# Altium PCB PCB_DH_7LED.PcbDoc
Units mil, origin at the board's own origin, x right, y up, seen from the top; angles counter-clockwise.
Board outline 9080 x 3075 mil, 2 copper layers (Top Layer, Bottom Layer); 75 components, 69 nets, 272 pads, 86 vias.
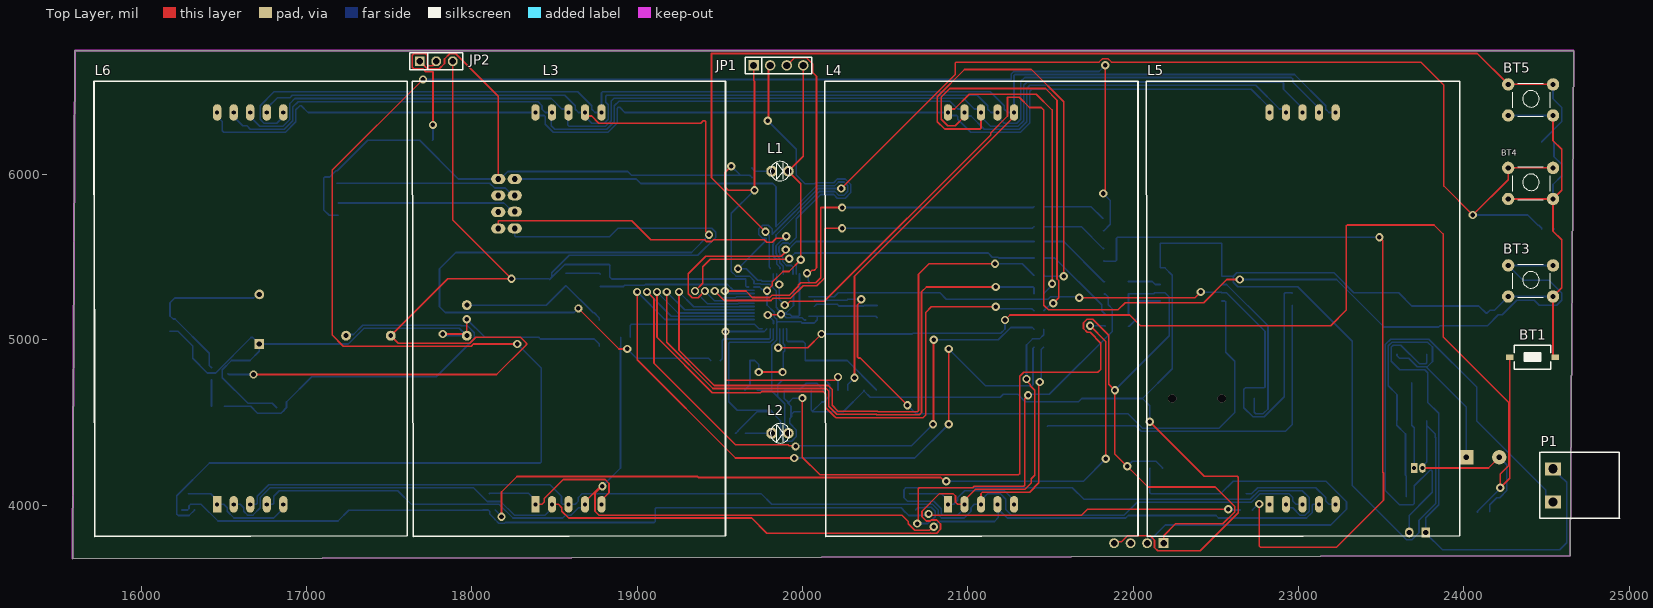
[diagram p0: Top Layer view]
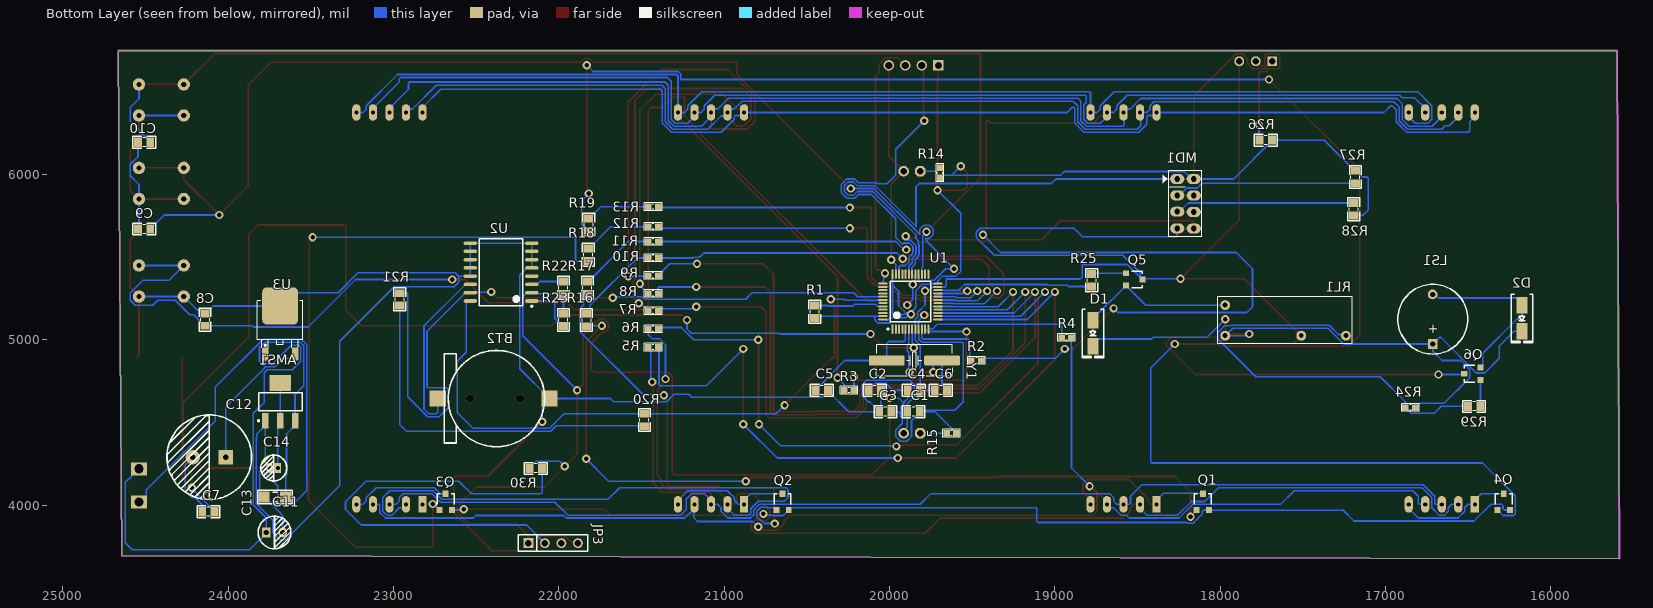
[diagram p1: Bottom Layer view, seen from below]

## Layer stack, top to bottom
Top Solder: solder mask 0.4, Solder Resist, Dk 3.5
Top Layer: signal copper 1.4
Dielectric 1: dielectric 12.6, FR-4, Dk 4.8
Bottom Layer: signal copper 1.4
Bottom Solder: solder mask 0.4, Solder Resist, Dk 3.5

## Board outline
15585,3675 15600,6750 24665,6750 24645,3695

## Design rules (kind name [scope] priority, off if disabled: settings)
Clearance [All] p1: gap=10 ignorepadtopadclearanceinfootprint=FALSE except(0: Arc-Hole Track-Hole SMDPad-Hole THPad-Hole Via-Hole Fill-Hole Poly-Hole Region-Hole Text-Hole; 8: Arc-Arc Arc-Track Track-Track)
PolygonConnect [All] p1: connectstyle=Relief reliefconductorwidth=10 reliefentries=4 polygonreliefangle="90 Angle" airgapwidth=10
RoutingVias [All] p1: holewidth=28 width=50 viastyle="Through Hole" minholewidth=28 minwidth=50 maxholewidth=28 maxwidth=50
SolderMaskExpansion [All] p1: expansion=4 istentingtop=FALSE
Width [All] p1: maxlimit=10 minlimit=10 preferedwidth=10
30 further rules are at their usual default settings.

## Classes and differential pairs
component class SCH_SPEAKER: D2 LS1 Q6 R29
component class SCH_RELAY: D1 Q5 R24 R25 RL1
component class SCH_POWER: AMS1 C11 C12 C13 C14 P1 U3
component class SCH_LED_7_SEG: L1 L2 L3 L4 L5 L6 Q1 Q2 Q3 Q4 R14 R15 R16 R17 R18 R19
component class SCH_IR: JP2 R26
component class SCH_ESP8266: MD1 R27 R28
component class SCH_DS3231: BT2 R20 R21 R22 R23 U2
component class SCH_DHT11: JP3 R30
component class SCH_DH_7LED: BT1 C1 C2 C3 C4 C5 C6 C7 JP1 R1 R2 R3 R4 R5 R6 R7 R8 R9 R10 R11 R12 R13 U1 Y1
component class SCH_BUTTON: BT3 BT4 BT5 C8 C9 C10

## Components (designator, comment, footprint, x,y, rotation, side; value= is the part's Value field where it differs from the comment)
AMS1 "" SOT223 23684.7,4625 r180 bottom value="AMS1117-3.3V SOT223"
BT1 "Nut Nhan 2 Chan SMD 3x6x2.5" "Nut Nhan 2 Chan SMD 3x6x2.5" 24416.08,4895 r180 top
BT2 "CR1220 SMD" "DE PIN CR1220" 22395,4645 r270 bottom
BT3 "" "Nut Nhan 4 Chan Cam 6x6" 24282,5458 r0 top
BT4 "" "Nut Nhan 4 Chan Cam 6x6" 24282,6048 r0 top
BT5 "" "Nut Nhan 4 Chan Cam 6x6" 24282,6553 r0 top
C1 "104" "tu 0805" 19855,4565 r0 bottom
C2 "104" "tu 0805" 20090,4695 r180 bottom
C3 "104" "tu 0805" 20025,4565 r0 bottom
C4 "104" "tu 0805" 19852.77,4695.13 r180 bottom
C5 "22pF" "tu 0805" 20410,4695 r180 bottom
C6 "22pF" "tu 0805" 19690,4695 r180 bottom
C7 "104" "tu 0805" 24120,3960 r0 bottom
C8 "104" "tu 0805" 24140.13,5122.43 r90 bottom
C9 "104" "tu 0805" 24508.56,5670 r0 bottom
C10 "104" "tu 0805" 24508.56,6195 r0 bottom
C11 "0.33uF" "tu hoa 5mm" 23720,3835 r180 bottom
C12 "10uF" "tu hoa 13mm" 24115,4290 r0 bottom
C13 "104" "tu 1206" 23717.49,4050 r0 bottom
C14 "22uF" "tu hoa 4mm" 23725,4225 r0 bottom
D1 "M7" "DIODE SMA" 18770,5040 r270 bottom
D2 "M7" "DIODE SMA" 16175,5130 r270 bottom
JP1 "JP" "JP 1x4 DT" 19705,6660 r0 top
JP2 "IR" "JP 1x3 CT" 17685,6685 r0 top
JP3 "DHT11" "JP 1x4 CT" 22185,3770 r180 bottom
L1 "" LED-3MM-RED 19815,6020 r0 top
L2 "" LED-3MM-RED 19815,4435 r0 top
L3 "" LED7SEG_2.3inch 18545,5040 r0 top
L4 "" LED7SEG_2.3inch 21040,5040 r0 top
L5 "" LED7SEG_2.3inch 22985,5040 r0 top
L6 "" LED7SEG_2.3inch 16620,5040 r0 top
LS1 "SPEAKER" "Coi Chip Speacker" 16714.5,4975 r90 bottom
MD1 "ESP8266 Module" "ESP2866 Module" 18260,5973 r270 bottom
P1 "" "CON 2 2EDG5.08" 24540,4220 r270 top
Q1 "" SOT23 18105,4020 r180 bottom value=C9014
Q2 "" SOT23 20647.4,4020 r180 bottom value=C9014
Q3 "" SOT23 22685,4020 r180 bottom value=C9014
Q4 "" SOT23 16285,4020 r180 bottom value=C9014
Q5 "HF" SOT23 18520,5365 r270 bottom value=C9014
Q6 "HF" SOT23 16475,4795 r90 bottom value=C9014
R1 "10k" "tro smd 0805" 20455,5170 r90 bottom
R2 "" "tro smd 0603" 19475,4875 r180 bottom
R3 "" "tro smd 0603" 20245,4695 r0 bottom
R4 "" "tro smd 0603" 18930,5015 r180 bottom
R5 "" "tro smd 0603" 21430,4955 r180 bottom
R6 "" "tro smd 0603" 21430,5065 r180 bottom
R7 "" "tro smd 0603" 21430,5175 r180 bottom
R8 "" "tro smd 0603" 21430,5280 r180 bottom
R9 "" "tro smd 0603" 21430,5390 r180 bottom
R10 "" "tro smd 0603" 21430,5495 r180 bottom
R11 "" "tro smd 0603" 21430,5595 r180 bottom
R12 "" "tro smd 0603" 21430,5685 r180 bottom
R13 "" "tro smd 0603" 21430,5805 r180 bottom
R14 "330R" "tro smd 0603" 19695,6010 r90 bottom
R15 "330R" "tro smd 0603" 19625,4435 r0 bottom
R16 "100R" "tro smd 0805" 21830,5120 r270 bottom
R17 "100R" "tro smd 0805" 21825,5315 r270 bottom
R18 "100R" "tro smd 0805" 21820,5515 r270 bottom
R19 "100R" "tro smd 0805" 21817.61,5697.57 r270 bottom
R20 "4.7k" "tro smd 0805" 21485,4515 r90 bottom
R21 "4.7k" "tro smd 0805" 22960,5245 r270 bottom
R22 "4.7k" "tro smd 0805" 21975,5315 r90 bottom
R23 "4.7k" "tro smd 0805" 21975,5120 r90 bottom
R24 "100R" "tro smd 0603" 16850,4590 r180 bottom
R25 "100R" "tro smd 0805" 18780,5360 r90 bottom
R26 "4.7k" "tro smd 0805" 17725,6210 r180 bottom
R27 "10k" "tro smd 0805" 17180,5985 r270 bottom
R28 "10k" "tro smd 0805" 17195,5790 r90 bottom
R29 "100R" "tro smd 0805" 16465,4600 r180 bottom
R30 "4.7k" "tro smd 0805" 22140,4220 r0 bottom
RL1 "" "Relay 4 chan HF46F" 17970,5025 r0 bottom
U1 "" STM32_LQPF48 19873.66,5231.42 r90 bottom
U2 "DS3231" "SOIC 16" 22350,5410 r0 bottom
U3 "" TO252 23686.14,5059.33 r180 bottom
Y1 "16Mhz" "Thach Anh 2 chan SMD" 19850,4875 r0 bottom value=4Mhz

## Footprints (in the part's own frame and the unit in brackets; to place one, negate y for a bottom-side part, rotate by r counter-clockwise, add the part's x,y. Pads: shape width x height; smd on the part's side, far side on the other; paste and mask are expansions set on the pad)
"Coi Chip Speacker" [mm]
  rect 1.5x1.5 hole 0.8: 1(0,0)
  round 1.5 hole 0.8: 2(7.62,0.013)
  silkscreen extent -1.55,-5.38 9.18,5.36, body extent -2.22,-6 13.24,6, height 4.5
"CON 2 2EDG5.08" [mm]
  rect 2x2.5 hole 1.4: 1(0,0) 2(5.08,0)
  silkscreen extent -2.54,-2.03 7.62,10.21, body extent -2.5,-1.75 7.58,10.25, height 3.15
"DE PIN CR1220" [mm]
  rect 2.5x2.5 smd: 1(0,-8.6) 2(0,8.6)
  silkscreen extent -7.39,-7.6 7.4,7.84, body extent -7.39,-9.42 7.36,9.38, height 4.27
"DIODE SMA" [mm] "SMA"
  rect 2.5x1.7 smd: 1(-2,0) 2(2,0)
  silkscreen extent -3.68,-1.65 3.75,1.65, body extent -2.6,-1.37 2.6,1.37, height 2.4
"ESP2866 Module" [mil]
  oval 60x86 hole 36: 1(0,0) 2(99,0) 3(198,0) 4(299,0) 5(0,100) 6(100,100) 7(199.5,100) 8(300,100)
  silkscreen extent -51,-86 350,149, body extent -137,-817 433,159, height 381
"JP 1x3 CT" [mm]
  rect 1.52x1.52 hole 1.02: 1(0,0)
  round 1.52 hole 1.02: 2(2.54,0) 3(5.08,0)
  silkscreen extent -1.52,-1.27 6.6,1.27, body extent -1.52,-1.25 6.6,1.25, height 8.51
"JP 1x4 CT" [mm]
  rect 1.52x1.52 hole 1.02: 1(0,0)
  round 1.52 hole 1.02: 2(2.54,0) 3(5.08,0) 4(7.62,0)
  silkscreen extent -1.52,-1.27 9.14,1.27, body extent -1.52,-1.25 9.14,1.25, height 8.51
"JP 1x4 DT" [mm] "4 pins, 1 row, straight, gold plating"
  rect 1.6x1.6 hole 1.1: 1(0,0)
  round 1.6 hole 1.1: 2(2.54,0) 3(5.08,0) 4(7.62,0)
  silkscreen extent -1.27,-1.27 8.89,1.27, body extent -1.27,-1.27 8.89,1.27, height 8.54
LED7SEG_2.3inch [mil] "Dán"
  rect 50x100 hole 25: 1(-160,-1035)
  oval 50x100 hole 25: 2(-60,-1035) 3(40,-1035) 4(140,-1035) 5(240,-1035) 6(240,1335.08) 7(140,1335.08) 8(40,1335.08) 9(-60,1335.08) 10(-160,1335.08)
  silkscreen extent -905,-1230 990,1525, body extent -905,-1228 985,1528, height 480
LED-3MM-RED [mil]
  oct 65x65 hole 40: 1(0,0)
  round 65 hole 40: 2(100,0)
  silkscreen extent -9,-59 109,59, body extent -27,-77 117,80, height 181
"Nut Nhan 2 Chan SMD 3x6x2.5" [mm] "Switch SMD type"
  rect 1.2x0.8 smd: 1(-3.5,0) 2(3.5,0)
  silkscreen extent -2.82,-1.85 2.82,1.85, body extent -3.05,-1.85 3.05,1.85, height 2.5
"Nut Nhan 4 Chan Cam 6x6" [mil] "SW button 4pin, 250 x250 mil"
  round 75 hole 31: 1(-13,-8) 1(258,-8) 2(-13,-196) 2(258,-196)
  silkscreen extent 15,-215 240,0, body extent -31,-225 281,19, height 276
"Relay 4 chan HF46F" [mil]
  round 60 hole 30: 1(0,0) 2(0,-185.04) 3(-460,0) 4(-730,0)
  silkscreen extent -770,-235 46,50, body extent -763,-228 40,48, height 154
"SOIC 16" [mm] "SOIC, 16-Leads, Body 10.30x7.50mm, Pitch 1.27mm, IPC Medium Density"
  oval 2.032x0.55 smd: 1(-4.725,4.445) 2(-4.725,3.175) 3(-4.725,1.905) 4(-4.725,0.635) 5(-4.725,-0.635) 6(-4.725,-1.905) 7(-4.725,-3.175) 8(-4.725,-4.445) 9(4.725,-4.445) 10(4.725,-3.175) 11(4.725,-1.905) 12(4.725,-0.635) 13(4.725,0.635) 14(4.725,1.905) 15(4.725,3.175) 16(4.725,4.445)
  silkscreen extent -4.85,-5.15 3.35,5.39, body extent -5.15,-5.17 5.16,5.16, height 2.48
SOT23 [mm] "SOT23"
  rect 0.9x0.95 smd: 1(-0.95,-1.25) 2(0,1.25)
  rect 0.9x0.95 smd mask+0: 3(0.95,-1.25)
  silkscreen extent -1.3,-0.38 1.3,1.25, body extent -1.52,-1.23 1.48,1.27, height 1.06
SOT223 [mm]
  rect 1x2.4 smd: 1(-2.3,-2.9) 2(0,-2.9) 3(2.3,-2.9)
  rect 3.3x2.4 smd: 4(0,2.9)
  silkscreen extent -3.48,-3.02 3.35,1.4, body extent -3.25,-3.56 3.25,3.4, height 1.68
STM32_LQPF48 [mm]
  oval 1.45x0.3 smd: 1(-4.225,2.75) 2(-4.225,2.25) 3(-4.225,1.75) 4(-4.225,1.25) 5(-4.225,0.75) 6(-4.225,0.25) 7(-4.225,-0.25) 8(-4.225,-0.75) 9(-4.225,-1.25) 10(-4.225,-1.75) 11(-4.225,-2.25) 12(-4.225,-2.75) 25(4.225,-2.75) 26(4.225,-2.25) 27(4.225,-1.75) 28(4.225,-1.25) 29(4.225,-0.75) 30(4.225,-0.25) 31(4.225,0.25) 32(4.225,0.75) 33(4.225,1.25) 34(4.225,1.75) 35(4.225,2.25) 36(4.225,2.75)
  oval 0.3x1.45 smd: 13(-2.75,-4.225) 14(-2.25,-4.225) 15(-1.75,-4.225) 16(-1.25,-4.225) 17(-0.75,-4.225) 18(-0.25,-4.225) 19(0.25,-4.225) 20(0.75,-4.225) 21(1.25,-4.225) 22(1.75,-4.225) 23(2.25,-4.225) 24(2.75,-4.225) 37(2.75,4.225) 38(2.25,4.225) 39(1.75,4.225) 40(1.25,4.225) 41(0.75,4.225) 42(0.25,4.225) 43(-0.25,4.225) 44(-0.75,4.225) 45(-1.25,4.225) 46(-1.75,4.225) 47(-2.25,4.225) 48(-2.75,4.225)
  silkscreen extent -4.35,-3.1 3.1,3.58, body extent -4.5,-4.5 4.5,4.5, height 1.6
"Thach Anh 2 chan SMD" [mm] "SMD Crystal HC49/US-SM package"
  round 0.508 on Mech15: 0(0,0)
  rrect25% 5.5x1.5 smd: 1(-4.25,0) 2(4.25,0)
  silkscreen extent -5.84,-2.41 5.84,2.41, body extent -6.4,-2.41 6.4,2.42, height 4.29
TO252 [mm] "TO252"
  round 0.5 on Mech15: 0(0,0)
  rrect25% 1x2 smd: 1(-2.285,-3.7) 3(2.285,-3.7)
  rrect25% 5.5x5.7 smd: 2(0,3.7)
  silkscreen extent -3.5,-2.7 3.5,4.5, body extent -3.3,-3.95 3.3,5.76, height 2.31
"tro smd 0603" [mm] "Chip Capacitor, 2-Leads, Body 1,60x0,80mm, IPC Medium Density"
  rect 1x0.95 smd mask+0.076: 1(-0.75,0) 2(0.75,0)
  silkscreen extent -1.35,-0.58 1.37,0.58, body extent -0.82,-0.42 0.82,0.43, height 0.44
"tro smd 0805" [mm]
  rect 1.2x1.4 smd: 1(-0.946,-0.061) 2(0.954,-0.061)
  silkscreen extent -1.75,-0.97 1.75,0.84, body extent -1.56,-0.76 1.44,0.64, height 0.53
"tu 0805" [mm] "Compoment SMD 80x50mil"
  rect 1.2x1.4 smd: 1(-0.946,-0.003) 2(0.954,-0.003)
  silkscreen extent -1.75,-0.89 1.75,0.89, body extent -1.01,-0.64 1.01,0.63, height 0.61
"tu 1206" [mm]
  rect 1.7x1.7 smd: 1(-1.65,0) 2(1.65,0)
  silkscreen extent -2.67,-1.02 2.67,1.02, body extent -1.57,-0.8 1.63,0.8, height 0.94
"tu hoa 4mm" [mm]
  rect 1x1.5 hole 0.6: 1(-0.635,0)
  oval 1x1.5 hole 0.6: 2(0.635,0)
  silkscreen extent -2,-2 2.01,2.01, body extent -2.47,-2.47 2.58,2.58, height 14.81
"tu hoa 5mm" [mm]
  rect 1.3x1.5 hole 0.8: 1(-1.27,0)
  oval 1.3x1.5 hole 0.8: 2(1.27,0)
  silkscreen extent -2.51,-2.51 2.51,2.51, body extent -3.12,-3.18 3.23,3.18, height 14.55
"tu hoa 13mm" [mm]
  rect 2.2x2.2 hole 0.9: 1(-2.54,0)
  round 2.2 hole 0.9: 2(2.54,0)
  silkscreen extent -6.5,-6.5 6.5,6.5, body extent -6.25,-6.25 6.26,6.25, height 23.02

## Part data
AMS1: library part "AMS1117 SMD", "Dán", Chung_Loai=Dán, Don_Vi=Con, Ma_Hang=MH000596
BT2: library part "De pin CR1220 SMD", Ma_Hang=MH000833, Ten="Đế PIN CR1220 SMD"
BT3 BT4 BT5: library part "Nut Nhan 4 Chan Cam 6x6", "Nut Nhan 4 Chan 6x6mm", Ma_Hang=MH004584, Ten="Nút Nhấn 4 Chân 6x6x5MM DIP"
C1 C2 C3 C4 C7 C8 C9 C10: library part "Tu 0805 104 50V 10%", "Dán", Chung_Loai=Dán, Don_Vi=Con, Ma_Hang=MH004551, So_Chan=2, Ten_Linh_Kien="Tụ 0805 104-100nF 10% 50V"
C5 C6: library part "Tu 0805 22pF 50V 10%", "Dán", Chung_Loai=Dán, Don_Vi=Con, Ma_Hang=MH004560, So_Chan=2, Ten_Linh_Kien="Tụ 0805 22P 10% 50V"
C11: library part "Tu Hoa 0.33uF 50V 5x11", "Cắm", Chung_Loai=Cắm, Don_Vi=Con, Ma_Hang=MH004655, So_Chan=2, Ten_Linh_Kien="Tụ Hóa 0.33uF 50V 5x11MM"
C12: library part "Tu Hoa 10uF 450V 13x20", "Cắm", Chung_Loai=Cắm, Don_Vi=Con, Ma_Hang=MH003950, So_Chan=2, Ten_Linh_Kien="Tụ Hóa 10uF 450V 13x20MM"
C13: library part "Tu 1206 104 50V 20%", "Dán", Chung_Loai=Dán, Don_Vi=Con, Ma_Hang=MH004544, So_Chan=2, Ten_Linh_Kien="Tụ 1206 104-0.1uF 20% 50V"
C14: library part "Tu Hoa 22uF 16V 4x7", "Cắm", Chung_Loai=Cắm, Don_Vi=Con, Ma_Hang=MH006857, So_Chan=2, Ten_Linh_Kien="Tụ Hóa 22uF 16V"
D1 D2: library part "Diode M7 ( 4007 )", "Dán", Chung_Loai=Dán, Don_Vi=Con, Ma_Hang=MH000944, Ten_Linh_Kien="Diode M7 1N4007 SMD 1A 1000V"
JP1: library part "JP 1x4 2.54 Duc Thang", "Cắm", Chung_Loai=Cắm, Don_Vi=Con, Ma_Hang=MH000903, Ten_Linh_Kien="Jump Đơn Đực 2.54MM 1x40P Thẳng 11MM"
JP2: library part "JP 1x3 2.54 Cai Thang", "Cắm", Chung_Loai=Cắm, Don_Vi=Con, Ma_Hang=MH004006, Ten_Linh_Kien="Jump Đơn Cái 2.54MM 1x20P Thẳng"
JP3: library part "JP 1x4 2.54 Cai Thang", "Cắm", Chung_Loai=Cắm, Don_Vi=Con, Ma_Hang=MH004006, Ten_Linh_Kien="Jump Đơn Cái 2.54MM 1x20P Thẳng"
L1 L2: library part "LED 3mm Do", "Cắm", Chung_Loai=Cắm, Don_Vi=Con, Ma_Hang=MH003892, Ten_Linh_Kien="Led 3MM Phủ Đỏ (10c)"
L3 L4 L5 L6: library part "LED 7x1 2.3inch Anot", "Dán", Chung_Loai=Dán, Don_Vi=Con, Ma_Hang=MH000901, Ten_Linh_Kien="Led 7 2.3 1 Số Anot (Sáng Đỏ)"
LS1: library part "Coi Chip Speaker", "Còi chip"
P1: library part "CON 2 EDG5.08", "Cắm", Chung_Loai=Cắm, Don_Vi=Con, Ma_Hang=MH000759, Ten_Linh_Kien="CON 2 2EDG5.08-2P 5.08MM ( Xanh Cong)"
Q1 Q2 Q3 Q4 Q5 Q6: library part "C1815 HF SMD", "NPN transistor"
R1 R27 R28: library part "Tro 0805 5% 10k", "Dán", Chung_Loai=Dán, Don_Vi=Con, Ma_Hang=MH005239, So_Chan=2, Ten_Linh_Kien="Trở 0805 5% 10k"
R2 R3 R4 R5 R6 R7 R8 R9 R10 R11 R12 R13 R24: library part "Tro 0603 5% 100R", "Dán", Chung_Loai=Dán, Don_Vi=Con, Ma_Hang=MH006315, So_Chan=2, Ten_Linh_Kien="Trở 0603 5% 100R"
R14 R15: library part "Tro 0603 5% 330R", "Dán", Chung_Loai=Dán, Don_Vi=Con, Ma_Hang=MH006910, So_Chan=2, Ten_Linh_Kien="Trở 0603 5% 330R"
R16 R17 R18 R19 R25 R29: library part "Tro 0805 5% 100R", "Dán", Chung_Loai=Dán, Don_Vi=Con, Ma_Hang=MH005251, So_Chan=2, Ten_Linh_Kien="Trở 0805 5% 100R"
R20 R21 R22 R23 R26 R30: library part "Tro 0805 5% 4.7k", "Dán", Chung_Loai=Dán, Don_Vi=Con, Ma_Hang=MH005307, So_Chan=2, Ten_Linh_Kien="Trở 0805 5% 4.7k"
RL1: library part "Relay 4 chan HF46F", "Relay 4 chan HF46F", Ma_Hang=MH003879, Ten="Relay 5V5A HF46F-G 5-HS1"
U1: library part STM32F103xx_LQFP48, ComponentLink1Description="Manufacturer Link", ComponentLink1URL=www.st.com/stm32, ComponentLink2Description=Datasheet, ComponentLink2URL=http://www.st.com/stonline/products/literature/ds/13587.pdf, DatasheetVersion="rev6, Mar-2008", PackageDescription="48-Pin Low-Profile Quad Flat Pack, 7 x 7 mm Body, 0.5 mm Pitch (LQFP48)", PackageReference=LQFP48, PackageVersion=Mar-2008, Published=30-May-2008, Publisher="Altium Limited"
U2: library part "DS3231 SMD", "SOIC"
U3: library part "78M05 SMD TO252", "Dán", Chung_Loai=Dán, Don_Vi=Con, Ma_Hang=MH001917, Ten_Linh_Kien="78M05 TO252"
Y1: library part "Thach Anh 2 chan SMD", "Crystal For all Crystal 2pin."
BT1: Ma_Hang=MH001036, Ten="Nút Nhấn 2 Chân 3x6x2.5MM SMD"

## Via types
v1: diameter 50, hole 28, Top Layer to Bottom Layer, 84 vias
v2: diameter 50, hole 50, Top Layer to Bottom Layer, 2 vias

## Nets (pads, with @x,y where several pads share a name; then routed paths per layer and width w, separated by ;. In a path a pad name is that pad's centre, name@x,y a point inside that pad or via, vN(x,y) a via of type N, cw(c..) or ccw(c..) an arc to the next point about the centre after c; other vN are vias at no path point)
3.3V: C1.1 C2.1 C3.1 C4.1 JP1.1 JP2.1 JP3.1 MD1.5 R14.1 R15.1 R22.1 R23.2 R26.2 R27.1 R28.1 R30.2 U1.9 U1.24 U1.36 U1.48 U2.2 | length 16514.3
  Top Layer w10: JP2.1 17729.92,6640.08 17803.61,6640.08 17835,6671.47 17835,6698.53 17866.39,6729.92 17903.61,6729.92 18160,6473.53 MD1.5 ; v1(19570,6050) 19530,6010 19530,5925.46 19550.46,5905 v1(19710,5905) 19710,6565 19705,6570 JP1.1 ; v1(19790,5150) 19792.5,5152.5 19867.5,5152.5 v1(19870,5155) ; v1(19999.82,4647.69) 19999.82,4290.18 20105,4185 21309.14,4185 21315,4190.86 21315,4779.57 21338.43,4803 21787.14,4803 21805,4820.86 21805,4980 21740,5045 21723.43,5045 21700,5068.43 21700,5104.14 21720.86,5125 21756.57,5125 21853,5028.57 21853,4732 v1(21890,4695) 21890,4310 22090.54,4109.46 22497.11,4109.46 22615,3991.57 22615,3958.43 22543.24,3886.68 22256.76,3886.68 22185,3814.92 JP3.1
  Bottom Layer w10: R28.1 17137.23,5752.77 17105,5785 17105,5979.14 17110.86,5985 17141.23,5985 17178.46,6022.23 R27.1 17186.33,6022.23 17371.71,6207.61 R26.2 17687.43,6203.67 17918.09,5973 MD1.5 18173,5973 18218,6018 18943.41,6018 18966.25,5995.16 19624.84,5995.16 ; v1(19570,6050) 19624.84,5995.16 ; R15.1 19596.46,4435 19610.16,4448.7 19610.16,4450.23 19725.06,4565.13 C1.1 ; R14.1 19695,5981.46 19681.3,5995.16 19624.84,5995.16 ; v1(19710,5905) 19570,5765 19570,5413.43 19597.81,5385.62 19679.51,5385.62 19707.32,5357.81 U1.24 19745.81,5339.69 19749.28,5336.21 19802.34,5336.21 19819.4,5319.16 19819.4,5317.88 19841.4,5295.88 19841.4,5196.85 19848,5190.25 19848,5187.82 19865.12,5170.71 19875.71,5170.71 19883.77,5162.65 19900.8,5162.65 19946.21,5208.06 19946.21,5294.45 19980.85,5329.09 ; v1(19790,5150) 19825,5115 19825,5098.15 19823.61,5096.76 ; U1.9 19823.23,5063.86 19823.23,5003.87 19804.36,4985 19560.86,4985 19555,4979.14 19555,4625 19605,4575 19807.91,4575 C1.1 ; v1(19870,5155) v1@19880.82,5155 ; 19910.57,4621.3 19916.3,4621.3 19942.69,4647.69 v1(19999.82,4647.69) ; U1.36 19981.93,5148.7 19976.07,5142.84 19934.53,5142.84 19922.37,5155 v1@19880.82,5155 ; C3.1 19949.15,4565.13 19935.78,4551.76 19935.78,4535.94 19931.2,4531.36 ; U1.48@20020,5120.24 20010.07,5120.24 19997.11,5133.2 19902.62,5133.2 v1@19880.82,5155 ; C2.1 20127.23,4698.8 20088.61,4737.43 20022.59,4737.43 19980.16,4695 C4.1 19890,4645.65 19910.57,4625.08 19910.57,4619.53 19931.2,4598.91 19931.2,4531.36 ; v1(21890,4695) 22218.98,5023.98 22218.98,5259.17 22193.15,5285 22131.65,5285 22124.42,5277.77 R22.1 R23.2 ; v1(21965,4235) 21994.95,4264.95 22138.95,4264.95 22177.57,4226.33 R30.2 ; C1.1 19817.77,4561.2 19867.5,4511.47 19867.5,4415.32 19895.32,4387.5 19934.68,4387.5 19962.5,4415.32 19962.5,4454.68 19922.41,4494.77 19922.41,4522.57 19931.2,4531.36
5V: D1.2 D2.2 LS1.1 R24.2 RL1.1 | length 4134
  Top Layer w10: v1(17825,5035) 17970,5035 v1(17970,5125)
  Bottom Layer w10: D2.2 16223.46,5051.26 16312.17,4962.56 16312.17,4888.39 16400.87,4799.69 16450.7,4799.69 16664.69,5013.67 16675.83,5013.67 LS1.1 ; R24.2 16819.49,4590 16793.88,4615.61 16645.98,4615.61 16490.51,4771.07 16490.51,4818.93 16546.28,4874.7 16658.73,4874.7 16714.5,4930.47 LS1.1 ; v1(17825,5035) 17835,5025 RL1.1 17925,5070 17348.64,5070 17253.64,4975 LS1.1 ; v1(17970,5125) 18080,5015 18406,5015 18415.53,5005.47 18741.54,5005.47 18770,4977.01 D1.2
12V: Q1.3 Q2.3 Q3.3 Q4.3 | length 6665.6
  Top Layer w10: v1(20763.16,3947) 20770.16,3940 21688.98,3940 21723.98,3975 v1(22575,3975)
  Bottom Layer w10: Q4.3 16280.32,3970.79 16289.39,3979.87 16289.39,3995.41 16298.47,4004.49 16364.3,4004.49 16464.79,3904 17190.44,3904 17255.44,3969 18065.81,3969 Q1.3 18100.31,3970.79 18109.39,3961.71 18109.39,3946.16 18140,3915.56 18140,3913.43 18163.43,3890 18196.57,3890 18201.57,3895 19104.14,3895 19110,3900.86 19110,3979.14 19115.86,3985 20595.79,3985 20596.3,3984.49 20597.28,3984.49 20610,3971.77 Q2.3 20610,3969.8 20642.72,3937.09 20708.73,3937.09 20710.99,3939.35 20755.51,3939.35 v1(20763.16,3947) ; v1(22575,3975) 22579.21,3970.79 Q3.3
+3.3V: AMS1.2 AMS1.4 C14.1 | length 520.5
  Bottom Layer w10: AMS1.4 AMS1.2 23684.7,4483.27 23700,4467.97 C14.1
+5: R20.1 R21.2 | length 2231
  Bottom Layer w10: R20.1 21484.83,4480 22015.91,4480 22048.91,4447 22921.79,4447 22962.39,4487.61 R21.2
+5V: AMS1.3 C12.1 C13.1 U3.3 | length 2249.8
  Bottom Layer w10: U3.3 23596.17,4903.43 23610.86,4888.75 23667.62,4888.75 23718.95,4837.42 23770.78,4837.42 23772.77,4835.43 ; C13.1 23652.53,4176.59 23647.31,4181.8 23647.31,4430.1 23594.15,4483.27 AMS1.3 23596.17,4512.85 23596.17,4668.82 23543.49,4721.51 23543.49,4963.82 23565.7,4986.03 23781.11,4986.03 23810.78,4956.36 23810.78,4868.52 23777.69,4835.43 23772.77,4835.43 ; C12.1 24015,4593.2 23772.77,4835.43
+12V: C11.1 P1.1 U3.1 | length 3085.2
  Bottom Layer w10: U3.1 23776.1,4861.28 23770.24,4855.42 23731.8,4855.42 23619.19,4968.03 23573.16,4968.03 23561.49,4956.36 23561.49,4870.96 23613.03,4819.42 23763.33,4819.42 23782.66,4800.09 23782.66,4621.49 23848.92,4555.23 23848.92,4002.87 23770,3923.95 C11.1 23770,3831.06 23871.06,3730 24580,3730 24622.21,3772.21 24622.21,4137.79 24584.21,4175.79 24584.21,4185.63 24549.84,4220 P1.1
BOOT0: R1.2 U1.44 | length 390.3
  Bottom Layer w10: 20072.81,5202.19 20085.63,5215 20211.1,5215 20221.1,5205 20371.57,5205 20374.14,5207.57 R1.2
GND: AMS1.1 BT1.1 BT2.2 BT3.2 BT4.2 BT5.2 C1.2 C2.2 C3.2 C4.2 C5.2 C6.1 C7.2 C8.2 C9.2 C10.2 C12.2 C14.2 JP1.4 JP2.3 JP3.4 L1.2 L2.2 MD1.4 Q5.2 Q6.2 R1.1 RL1.3 U1.8 U1.23 U1.35 U1.47 U2.5 U2.6 U2.7 U2.8 U2.9 U2.10 U2.11 U2.12 U2.13 U3.2 | length 28140
  Top Layer w10: v1(16680,4790) 18150,4790 18330.86,4970.86 18330.86,4979.14 18295,5015 18023.64,5015 17988.64,4980 17555,4980 RL1.3 17855,5370 v1(18240,5370) 17885,5725 JP2.3 ; v1(19785.78,5296.21) 19818.13,5328.57 19818.13,5349.75 19881.93,5413.55 19918.55,5413.55 v1(19990,5485) 19990,5945 L1.2 20005,6110 JP1.4 ; JP3.4 21893.45,3778.45 21929.92,3778.45 21966.39,3814.92 22103.61,3814.92 22129.92,3788.61 22129.92,3744.02 22148.87,3725.08 22407.1,3725.08 22635.86,3953.83 22635.86,4169.14 22630,4175 22430,4175 v1(22100,4505) ; C14.2 24150,4225 C12.2 ; BT4.2@24269,5852 BT4.2@24540,5852 ; BT5.2@24540,6357 24540,6205.08 24592.5,6152.58 24592.5,5904.5 BT4.2@24540,5852 ; BT1.1 24550.75,4895 24540,4905.75 24540,5262 24592.5,5314.5 24592.5,5605.08 24540,5657.58 BT4.2@24540,5852
  Bottom Layer w10: Q6.2 16529.21,4790 v1(16680,4790) ; v1(18240,5370) 18465.79,5370 Q5.2 18471.77,5365 Q5.2@18484.49,5377.72 ; MD1.4 18260,5629 18265.86,5623.14 18832.78,5623.14 18884.64,5675 19451.57,5675 19475,5651.57 19475,5618.43 19367.24,5510.67 18589.16,5510.67 18484.49,5406 Q5.2@18484.49,5377.72 ; 19675,5320 19662.17,5320 19656.32,5325.86 19656.32,5367.62 18847.38,5367.62 18835,5380 18835,5450 18835.86,5450.86 18830.86,5455.86 18562.63,5455.86 Q5.2@18484.49,5377.72 ; U1.23 19740.04,5320 19756.17,5303.87 19778.12,5303.87 v1(19785.78,5296.21) 19785.78,5210.79 19830,5166.57 19830,5138.43 19844.13,5124.3 19844.13,5104.14 ; C6.1 19727.36,4695 C4.2 ; L2.2 19915,4449.88 19892.57,4472.31 C1.2 19892.57,4613.69 19851.38,4654.88 ; U1.35 19962.24,5456.19 19990,5483.94 v1(19990,5485) ; U1.47 20086.31,5142.83 20086.48,5142.66 ; C2.2 20052.43,4575.28 C3.2 ; C5.2 C5.2@20372.43,4690.93 ; R1.1 20442.72,5142.66 20086.48,5142.66 ; v1(22100,4505) 22100,4601.42 BT2.2 ; C14.2 23750,4234.84 23775.25,4260.09 AMS1.1@23775.25,4483.27 ; AMS1.1 AMS1.1@23775.25,4483.27 ; C7.2 24157.57,4002.69 24200.44,4045.56 24217.13,4045.56 24260,4088.43 24260,4245 C12.2 ; BT5.2@24269,6357 BT5.2@24540,6357 ; BT3.2@24540,5262 24269,5262 24185.62,5178.62 24158.62,5178.62 C8.2 24136.06,5160 24091.06,5205 U3.2 23606,5285.14 23335.32,5285.14 23215.46,5405 22628.43,5405 ; C9.2 24540,5676.27 24540,5852 24540,5939.42 24592.5,5991.92 24592.5,6061.75 24546.14,6108.11 C10.2 ; C4.2 19815.2,4691.06 19851.38,4654.88 ; C4.2 19813.52,4696.68 19813.52,4967.94 19844.13,4998.56 U1.8 19844.13,5104.14 ; 19844.13,5104.14 19849.99,5110 19989.21,5110 19996.97,5102.24 20071.3,5102.24 20090,5120.95 20090,5139.14 20086.48,5142.66 ; 19851.38,4654.88 19851.38,4728.77 19878.03,4755.43 20139.06,4755.43 20165.85,4728.64 20165.85,4661.09 20129.15,4624.39 20117.9,4624.39 20062.57,4569.07 C3.2 ; C3.2 20246.63,4565.13 C5.2@20372.43,4690.93 ; C5.2@20372.43,4690.93 20411.05,4652.31 21197.31,4652.31 21215,4670 21303.43,4670 21348.43,4625 21670.32,4625 21690.32,4645 BT2.2 ; BT2.2 22236.98,4825.56 22236.98,5391.17 22193.15,5435 U2.5 U2.6 U2.7 U2.8 U2.9 U2.10 U2.11 U2.12 U2.13 22606.07,5385 22626.07,5405 22628.43,5405 ; 22628.43,5405 22605,5381.57 22605,5348.43 22632.58,5320.85 22996.17,5320.85 23324.68,4992.34 23324.68,4118.98 23653.19,3790.47 23686.81,3790.47 23729.41,3833.07 23729.41,3908.81 23830.92,4010.32 23830.92,4407.02 23827.93,4410 23827.93,4430.58 AMS1.1@23775.25,4483.27
IR_DATA: JP2.2 R26.1 | length 850
  Top Layer w10: v1(17765,6300) 17765,6622.08 17722.47,6622.08 17704.47,6640.08 17648.87,6640.08 17640.08,6648.87 17640.08,6721.13 17648.87,6729.92 17721.13,6729.92 17729.92,6721.13 17729.92,6665.53 17737.38,6658.08 17765,6658.08 17765,6665 JP2.2
  Bottom Layer w10: R26.1 17765,6210.38 v1(17765,6300)
LEDA: L3.7 L4.7 L5.7 L6.7 R2.2 | length 12374.9
  Top Layer w10: v1(18645,5190) 18890,4945 v1(18940,4945) ; L3.7 18685,6371.99 18703.48,6353.51 18725,6353.51 18768.43,6310.08 19385.08,6310.08 19400.86,6325.86 19409.14,6325.86 19415,6320 19415,5655 v1(19435,5635)
  Bottom Layer w10: L6.7@16760,6357.08 16760,6400.08 16824.92,6465 16900,6465 16915,6480 18561.65,6480 18625,6416.65 18625,6395.08 18645,6375.08 L3.7 18685,6350.08 18725,6310.08 18801.57,6310.08 18825,6333.51 18825,6422.46 18810,6437.46 18810,6474.14 18815.86,6480 21056.65,6480 21120,6416.65 21120,6395.08 21140,6375.08 L4.7 21180,6350.08 21220,6310.08 21296.57,6310.08 21320,6333.51 21320,6563.14 21343.86,6587 22957.14,6587 22965,6579.14 22965,6560.08 23125,6400.08 L5.7 ; v1(18645,5190) 18620,5165 17840,5165 17805,5200 17805,5430 17903.67,5528.67 19328.67,5528.67 v1(19435,5635) ; v1(18940,4945) 18996.3,4888.7 19431.77,4888.7 R2.2
LEDB: L3.6 L4.6 L5.6 L6.6 R3.2 | length 9495.1
  Top Layer w10: v1(20315,4770) 20315,5385.08 21280,6350.08 L4.6
  Bottom Layer w10: L6.6 16860,6350.08 16820,6310.08 16743.43,6310.08 16720,6333.51 16720,6416.65 16803.35,6500 18641.65,6500 18725,6416.65 18725,6395.08 18745,6375.08 L3.6 18785,6494.14 18790.86,6500 21136.65,6500 21220,6416.65 21220,6395.08 21240,6375.08 L4.6 21280,6599.14 21285.86,6605 22976.65,6605 23165,6416.65 23165,6395.08 23185,6375.08 L5.6 ; R3.2 20275,4695.47 20275,4730 v1(20315,4770)
LEDC: L3.4 L4.4 L5.4 L6.4 R4.2 | length 8007.8
  Top Layer w10: L3.4 18685,4020 18780,4115 v1(18790,4115) 18745,4070 18745,3963.43 18768.43,3940 20600,3940 20639.24,3900.76 20639.24,3887.94 20678.48,3848.7 20768.7,3848.7 20790,3870 v1(20795,3870)
  Bottom Layer w10: L6.4 16796.14,4005 16802,4010.86 16802,4054.02 16835.98,4088 17551.39,4088 17634.9,4004.49 18166.33,4004.49 18248.82,3922 18550.43,3922 18568.43,3940 18601.57,3940 18645,3983.43 18666.52,3983.43 18685,4001.91 L3.4 ; v1(18790,4115) 18900,4225 18900,4961.57 18900.47,4962.04 R4.2 ; v1(20795,3870) 20826.33,3901.33 21161.33,3901.33 21185,3925 L4.4@21185,3975 ; L4.4 21185,4000 L4.4@21185,3975 ; L5.4 23088.86,4005 23083,3999.14 23083,3955.98 23049.02,3922 22516.92,3922 22501.83,3937.09 21969.72,3937.09 21954.64,3922 21238,3922 L4.4@21185,3975
LEDD: L3.3 L4.3 L5.3 L6.3 R5.1 | length 8179.5
  Top Layer w10: L4.3 21080,4070 21089,4079 21374,4079 21430,4135 21430,4740 v1(21435,4745)
  Bottom Layer w10: L6.3 16696.14,4005 16702,4010.86 16702,4054.02 16771.98,4124 18473.02,4124 18543,4054.02 18543,4010.86 18548.86,4005 L3.3 18625,4005 18645,4025 18645,4046.57 18668.43,4070 19749.5,4070 19814.5,4005 20787.19,4005 20821.16,3971.02 20821.16,3942.17 20841.33,3922 20978.57,3922 21020,3963.43 21020,3985 21040,4005 L4.3 21080,4030 21120,4070 21196.57,4070 21230,4036.57 21230,3973.43 21263.43,3940 21947.18,3940 22024.69,4017.51 22716.39,4017.51 22768.87,4070 22941.57,4070 22965,4046.57 22965,4025 22985,4005 L5.3 ; v1(21435,4745) 21442.65,4752.65 21442.65,4773.48 21444.84,4775.67 21444.84,4941.3 21458.54,4955 R5.1
LEDE: L3.2 L4.2 L5.2 L6.2 R6.1 | length 9978.6
  Top Layer w10: L3.2 18525,4005 18545,3985 18545,3963.43 18586.43,3922 19692.82,3922 19784.13,3830.7 20776.15,3830.7 20776.94,3831.49 20778.43,3830 20811.57,3830 20835,3853.43 20835,3886.57 20811.57,3910 20778.43,3910 20772.38,3903.94 20749.65,3903.94 20723.16,3930.43 20723.16,3963.57 20829.59,4070 20911.21,4070 20925.61,4055.61 20925.61,4019.39 20940,4005 L4.2 20980,4030 21047,4097 21346.6,4097 21384.14,4134.54 21384.14,4160 21405,4180.86 21405,4695 21377.82,4722.18 21377.82,4729.36 21355,4752.18 v1(21355,4763)
  Bottom Layer w10: L6.2 16600,4005 16620,3985 16620,3963.43 16643.43,3940 16676.57,3940 16720,3983.43 16720,4046.57 16779.43,4106 18010.58,4106 18094.09,4022.49 18173.79,4022.49 18256.28,3940 18445,3940 18485,3980 L3.2 ; L4.2 20980,3980 20940,3940 20848.79,3940 20839.16,3949.62 20839.16,3978.48 20794.64,4023 20635.98,4023 20614.69,4044.3 20614.69,4094.13 20625.56,4105 20972.98,4105 20973.98,4106 21632.5,4106 21702.99,4035.51 22708.93,4035.51 22761.42,4088 23023.57,4088 23065,4046.57 23065,3963.43 23041.57,3940 23008.43,3940 22965,3983.43 22943.48,3983.43 22925,4001.91 L5.2 ; v1(21355,4763) 21355,4969.13 21391.48,5005.61 21433.83,5005.61 21459.53,5031.3 R6.1
LEDF: L3.9 L4.9 L5.9 L6.9 R7.1 | length 9584.9
  Top Layer w10: L4.9 20980,6350.86 20924.14,6295 20878.51,6295 20840,6333.51 20840,6469.09 20890.91,6520 21470,6520 21540,6450 21540,5368.43 21550,5358.43 21550,5254.3 v1(21516.64,5220.94)
  Bottom Layer w10: L6.9 16560,6350.08 16615.08,6295 16640,6295 16660.92,6274.08 16866.02,6274.08 16918,6326.06 16918,6408 16950.08,6440.08 18401.57,6440.08 18425,6416.65 18425,6395.08 18445,6375.08 18480,6375.08 L3.9 18480,6370.08 18480,6295 18500.92,6274.08 18816.48,6274.08 18861,6318.6 18861,6415 18890,6444 20892.65,6444 20940,6396.65 20961.52,6396.65 20980,6378.17 L4.9 20980,6371.99 20998.48,6353.51 21020,6353.51 21099.43,6274.08 21311.48,6274.08 21356,6318.6 21356,6520.14 21375.86,6540 22741.65,6540 22885,6396.65 22906.52,6396.65 22925,6378.17 L5.9 ; R7.1 21460.51,5175 21506.46,5220.94 v1(21516.64,5220.94)
LEDG: L3.10 L4.10 L5.10 L6.10 R8.1 | length 8994.7
  Top Layer w10: L4.10 20880,6378.17 20898.48,6396.65 20920,6396.65 21008.35,6485 21415,6485 21510,6390 v1(21510,5340)
  Bottom Layer w10: L6.10 16460,6350.08 16490,6320.08 16490,6265 16498.92,6256.08 16873.48,6256.08 16936,6318.6 16936,6391 16960.86,6415.86 16969.14,6415.86 17009.92,6375.08 L3.10 18403,6357.08 18439.14,6357.08 18445,6351.22 18445,6304.54 18493.46,6256.08 18823.94,6256.08 18879,6311.14 18879,6399 18885.86,6405.86 18894.14,6405.86 18924.92,6375.08 L4.10 20898,6357.08 20934.14,6357.08 20940,6351.22 20940,6333.51 21017.43,6256.08 21318.94,6256.08 21374,6311.14 21374,6502.72 21389.14,6517.86 21392,6515 22715,6515 22825,6405 L5.10 ; R8.1 21460.51,5280 21510,5329.49 v1(21510,5340)
LEDH: L3.8 L4.8 L5.8 L6.8 R9.1 | length 9862.1
  Top Layer w10: L4.8 21080,6280.86 21074.14,6275 20860,6275 20815,6320 20815,6469.54 20980.46,6635 21385,6635 21580,6440 v1(21580,5385)
  Bottom Layer w10: L6.8 16660,6350.08 16718,6292.08 16858.57,6292.08 16900,6333.51 16900,6430 16930,6460 18481.65,6460 18545,6396.65 18566.52,6396.65 18585,6378.17 L3.8 18580,6370.08 18580,6300 18587.92,6292.08 18809.02,6292.08 18843,6326.06 18843,6445 18860,6462 20974.65,6462 21040,6396.65 21061.52,6396.65 21080,6378.17 L4.8 21080,6350.08 21138,6292.08 21304.02,6292.08 21338,6326.06 21338,6539.72 21359.14,6560.86 21360,6560 22904.14,6560 22910,6554.14 22910,6515.08 23025,6400.08 L5.8 ; R9.1 21464.53,5385 v1(21580,5385)
NetBT2_1: BT2.1 U2.14 | length 1069.6
  Bottom Layer w10: U2.14 22565.2,5335 22815.8,5084.4 22815.8,4582.12 22785.68,4552 22742.54,4552 22732,4562.54 22732,4643.42 BT2.1
NetBT3_1: BT3.1 C8.1 U1.29 | length 7720.7
  Top Layer w10: v1(19892.28,5210.71) 19903.11,5210.71 19925.11,5232.71 20132.71,5232.71 21140,6240 21140,6253.51 21240,6353.51 21240,6467 21311.5,6467 21373.5,6405 21445,6405 21460,6390 21460,5210 21489.06,5180.94 21908.01,5180.94 21952.06,5225 22427.09,5225 22567.09,5365 v1(22645,5365)
  Bottom Layer w10: U1.29 19844.13,5358.79 19859.4,5343.52 v1(19859.4,5334.45) 19859.4,5243.6 v1(19892.28,5210.71) ; v1(22645,5365) 23230,5365 23517.2,5077.8 23848.77,5077.8 23856.18,5085.2 C8.1 24143.94,5085.2 24209.56,5150.82 24232.07,5150.82 24321.5,5240.25 24426.25,5240.25 24457,5209.5 24561.75,5209.5 24592.5,5240.25 24592.5,5283.75 24515.59,5360.65 24358.35,5360.65 24269,5450 BT3.1@24540,5450
NetBT4_1: BT4.1 C9.1 U1.28 | length 7324.4
  Top Layer w10: v1(20235,5915) 20925,6605 20925,6674.14 20930.86,6680 21794.07,6680 21815.11,6701.04 21848.24,6701.04 21869.28,6680 23740,6680 23880,6540 23880,5930 v1(24055,5755) 24269,5969 24269,6040 BT4.1@24540,6040
  Bottom Layer w10: U1.28 19824.45,5363.54 19815.12,5354.21 19756.73,5354.21 19750.36,5360.59 19730,5360.59 19660.59,5430 v1(19610,5430) 19782,5602 19782,5613.28 19760.15,5613.28 19736.72,5636.72 19736.72,5669.85 19760.15,5693.28 19793.28,5693.28 19816.72,5669.85 19816.72,5638.74 19817.73,5637.73 20095,5915 v1(20235,5915) ; v1(24055,5755) 24386.47,5755 24448.78,5692.69 24452.71,5692.69 24471.33,5674.07 C9.1
NetBT5_1: BT5.1 C10.1 U1.27 | length 7038.3
  Top Layer w10: v1(19776.72,5653.28) 19450,5980 19450,6732 24082,6732 24269,6545 BT5.1@24540,6545
  Bottom Layer w10: v1(19776.72,5653.28) 19800,5630 19800,5440.04 19805.02,5435.02 19805.02,5430.02 ; C10.1 24471.33,6199.07 24592.5,6320.24 24592.5,6405.08 24540,6457.58 BT5.1@24540,6545
NetC11_2: C11.2 C13.2 P1.2 | length 3361.8
  Bottom Layer w10: C11.2 23670,3937.55 C13.2 23809.93,4077.48 23809.93,4206.04 23804.08,4211.9 23795.79,4211.9 23701,4117.1 23701,4010.32 23692.21,4001.54 23612.85,4001.54 23525.49,4088.9 23525.49,4971.27 23558.25,5004.03 23788.57,5004.03 24078.37,4714.23 24078.37,4509.09 24495.79,4091.67 24495.79,4054.37 24530.16,4020 P1.2
NetD1_1: D1.1 Q5.3 RL1.2 | length 944.4
  Bottom Layer w10: RL1.2 18450.67,5210.04 18568.23,5327.6 Q5.3 18570.2,5327.6 18734.84,5162.95 18741.54,5162.95 18770,5134.49 D1.1
NetD2_1: D2.1 LS1.2 Q6.3 | length 1063.7
  Bottom Layer w10: Q6.3 16424.8,4832.4 16412.09,4845.12 16412.09,4918.06 16204.54,5125.61 16193.92,5125.61 16175,5144.53 D2.1 16175,5224.49 16203.46,5252.95 16679.68,5252.95 16701.73,5275 LS1.2
NetJP3_2: JP3.2 R30.1 | length 2759.5
  Bottom Layer w10: JP3.2 22194.77,3879.77 23194.77,3879.77 23290.86,3975.86 23290.86,4020.71 23166.57,4145 22605,4145 22530,4070 22105.86,4070 22100,4075.86 22100,4219.62 R30.1
NetL1_1: L1.1 R14.2 | length 128.7
  Bottom Layer w10: R14.2 19695,6038.54 19713.54,6020 L1.1
NetL2_1: L2.1 R15.2 | length 160.5
  Bottom Layer w10: R15.2 L2.1
NetL3_1: L3.1 L3.5 Q1.2 | length 997.8
  Top Layer w10: L3.1 18425,4005 18438.91,4018.91 18438.91,4040.48 18553.43,4155 18806.57,4155 18830,4131.57 18830,4075 18785,4030 L3.5
  Bottom Layer w10: Q1.2 18107.3,4071.51 18343.49,4071.51 18385,4030 L3.1
NetL4_1: L4.1 L4.5 Q2.2 | length 767.6
  Bottom Layer w10: Q2.2 20840.79,4069.21 20880,4030 L4.1 20916.14,4005 20940,4028.86 20940,4046.57 20981.43,4088 21222,4088 21280,4030 L4.5
NetL5_5: L5.5 Q3.2 | length 609.7
  Bottom Layer w10: Q3.2 22685.79,4070 22717.96,4070 22753.96,4106 23105.57,4106 23165,4046.57 23165,4025 23185,4005 L5.5
NetL6_1: L6.1 L6.5 Q4.2 | length 712.3
  Bottom Layer w10: Q4.2 16420.79,4069.21 16460,4030 L6.1 16500,4005 16520,3985 16520,3963.43 16561.43,3922 16802,3922 16860,3980 L6.5
NetMD1_1: MD1.1 U1.30 | length 3220.8
  Bottom Layer w10: MD1.1 18994.4,5973 19021.61,5945.79 19820.7,5945.79 19840,5926.49 19840,5685.46 20087.54,5933 20196.43,5933 20218.43,5955 20251.57,5955 20275,5931.57 20275,5898.43 20251.57,5875 20218.43,5875 20196.43,5897 20102.46,5897 19840,5634.54 19840,5613.43 19826.56,5599.99 19826.56,5581.67 19822.32,5577.43 19822.32,5514.46 19826.56,5510.22 19826.56,5502.14 19844,5484.7 19844,5458.52 19864.27,5438.25 19864.27,5430.73
NetMD1_2: MD1.2 R27.2 | length 1108
  Bottom Layer w10: R27.2 18108.94,5947.43 18138.36,5918 18203,5918 18247,5874 MD1.2
NetMD1_3: MD1.3 R28.2 | length 1089.2
  Bottom Layer w10: R28.2 18194.43,5827.57 18247,5775 MD1.3
NetMD1_8: MD1.8 U1.31 | length 2152.3
  Top Layer w10: MD1.8 18160.86,5673.86 18160.86,5720 18967.09,5720 19082.09,5605 19408.43,5605 19418.43,5595 19451.57,5595 19461.57,5605 19768.43,5605 19783.43,5590 19816.57,5590 19841.57,5615 19901.49,5615 v1(19901.49,5625.94)
  Bottom Layer w10: U1.31 19883.5,5444.47 19862,5465.98 19862,5492.16 19844.56,5509.6 19844.56,5517.68 19840.32,5521.92 19840.32,5569.97 19874.29,5603.94 19889.48,5603.94 19900.53,5615 19901.49,5615 v1(19901.49,5625.94)
NetQ1_1: Q1.1 R16.2 | length 4905.2
  Top Layer w10: v1(18180,3930) 18180,4080 18273,4173 19365.68,4173 19371.68,4167 20483.5,4167 20837.18,4167 20859.18,4145 v1(20870,4145) ; v1(21740,5085) 21835,4990 v1(21835,4280)
  Bottom Layer w10: Q1.1 18180,3933.19 v1(18180,3930) ; v1(20870,4145) 21700,4145 v1(21835,4280) ; v1(21740,5085) 21829.82,5085 R16.2
NetQ2_1: Q2.1 R17.2 | length 2630.1
  Top Layer w10: v1(20695.05,3888.7) 20700.11,3893.75 20700.11,4099.14 20705.97,4105 21029.54,4105 21039.54,4115 21339.14,4115 21345,4120.86 21345,4644.14 21365,4664.14 v1(21365,4665)
  Bottom Layer w10: Q2.1 20684.8,3971.77 20697.52,3984.49 20737.37,3984.49 20739.88,3987 20779.73,3987 20803.16,3963.57 20803.16,3930.43 20782.73,3910 20778.43,3910 20757.13,3888.7 v1(20695.05,3888.7) ; v1(21365,4665) 21370,4670 21492.36,4670 21874.95,5052.59 21874.95,5187.06 21849.95,5212.06 21849.95,5258.8 21831.33,5277.43 R17.2
NetQ3_1: Q3.1 R18.2 | length 4591.2
  Top Layer w10: v1(22762.72,4007.28) 22762.72,3752.72 22770.44,3745 23230,3745 23515,4030 23515,4195 23510,4200 23510,5600 v1(23490,5620)
  Bottom Layer w10: R18.2 21824.82,5475 21894.14,5475 21900,5480.86 21900,5614.14 21905.86,5620 v1(23490,5620) ; Q3.1 22722.4,3971.77 22757.91,4007.28 v1(22762.72,4007.28)
NetQ4_1: Q4.1 R19.2 | length 11451
  Top Layer w10: v1(17705,6575) 17155,6025 17155,5030 17223,4962 17996.1,4962 18009.1,4975 v1(18275,4975) ; v1(21820,5885) 21831.67,5896.67 v1(21831.67,6661.04)
  Bottom Layer w10: Q4.1 16322.4,3969.8 16289.68,3937.09 16223.67,3937.09 16214.88,3945.87 16214.88,4056.72 16413.16,4255 18414.14,4255 18420,4260.86 18420,4830 v1(18275,4975) ; v1(17705,6575) 21262,6575 21262,6606.6 21278.4,6623 21793.64,6623 v1(21831.67,6661.04) ; R19.2 21823.94,5660 21862.56,5698.62 21862.56,5842.44 v1(21820,5885)
NetQ5_1: Q5.1 R25.2 | length 210.4
  Bottom Layer w10: Q5.1 18772.78,5402.4 R25.2
NetQ6_1: Q6.1 R29.2 | length 160.7
  Bottom Layer w10: Q6.1 16425.79,4599.24 R29.2
NetR2_1: R2.1 U1.10 | length 474.9
  Bottom Layer w10: R2.1 19515,4885.47 19515,4995 19525,5005 19798.91,5005 19804.76,5010.86 U1.10
NetR3_1: R3.1 U1.11 | length 1319.8
  Top Layer w10: v1(19535,5050) 19535,4755 20195,4755 v1(20215,4775)
  Bottom Layer w10: v1(19535,5050) 19770,5050 U1.11 ; v1(20215,4775) 20215,4695.47 R3.1
NetR4_1: R4.1 U1.12 | length 883.2
  Bottom Layer w10: R4.1 18959.53,5089.14 18965.39,5095 19710,5095 19737,5068 19755,5068
NetR5_2: R5.2 U1.13 | length 4690.6
  Top Layer w10: v1(19000,5290) 19000,4880 19595,4285 v1(19950,4285) ; v1(20885,4490) v1(20885,4945)
  Bottom Layer w10: v1(19000,5290) 19166.85,5123.15 U1.13 ; v1(19950,4285) 20680,4285 v1(20885,4490) ; v1(20885,4945) 21107,4723 21389.14,4723 21395,4728.86 21395,4949.53 R5.2
NetR6_2: R6.2 U1.14 | length 4262.5
  Top Layer w10: v1(19060,5290.02) 19102,5248.02 19102,4858 19595,4365 19913.45,4365 19918.45,4360 19953.78,4360 v1(19958.45,4355.33) ; v1(20790,4490) 20792.5,4492.5 20792.5,4997.5 v1(20795,5000)
  Bottom Layer w10: v1(19060,5290.02) 19207.19,5142.83 U1.14 ; v1(19958.45,4355.33) 19963.12,4360 20660,4360 v1(20790,4490) ; v1(20795,5000) 21185,5000 21260,5075 21390.47,5075 R6.2
NetR7_2: R7.2 U1.15 | length 4102.4
  Top Layer w10: v1(19120,5289.74) 19120,5015 19455,4680 19746.85,4680 19754.54,4687.69 20124.31,4687.69 20141.49,4670.51 20141.49,4588.51 20195,4535 20197.52,4535 20203.52,4529 20729,4529 20745,4545 20745,5165 20780,5200 v1(21170,5200)
  Bottom Layer w10: v1(19120,5289.74) 19247.22,5162.52 U1.15 ; v1(21170,5200) 21180.82,5200 21192.12,5188.7 21386.77,5188.7 R7.2
NetR8_2: R8.2 U1.16 | length 4116.8
  Top Layer w10: v1(19180,5289.74) 19180,4985 19459.31,4705.69 20144.31,4705.69 20159.49,4690.51 20159.49,4598.48 20207.98,4550 20446.26,4550 20449.26,4547 20707,4547 20720,4560 20720,5290 20750,5320 v1(21170,5320)
  Bottom Layer w10: v1(19180,5289.74) 19287.53,5182.2 U1.16 ; v1(21170,5320) 21394.61,5320 21400.47,5314.14 R8.2
NetR9_2: R9.2 U1.17 | length 4084.1
  Top Layer w10: v1(19253.63,5289.74) 19253.63,4936.82 19466.76,4723.69 20156.31,4723.69 20180,4700 20180,4603.43 20215.43,4568 20453.72,4568 20456.72,4565 20695,4565 20702,4572 20702,5397 20765,5460 v1(21165,5460)
  Bottom Layer w10: v1(19253.63,5289.74) 19342.37,5201 19618.03,5201 19618.92,5201.89 U1.17 ; v1(21165,5460) 21329.49,5460 21399.49,5390 R9.2
NetR10_1: R10.1 R16.1 | length 533.8
  Bottom Layer w10: R10.1 21526.57,5495 21809.83,5211.73 21809.83,5175.85 21828.46,5157.23 R16.1
NetR10_2: R10.2 U1.18 | length 2606.6
  Top Layer w10: v1(19350,5295) 19396.33,5341.33 19396.33,5441.33 19442,5487 19917,5487 v1(19920,5490)
  Bottom Layer w10: v1(19350,5295) 19426,5219 19610.58,5219 19613.15,5221.57 U1.18 ; v1(19920,5490) 19955,5525 21123.43,5525 21148.43,5500 21181.57,5500 21186.57,5495 R10.2
NetR11_1: R11.1 R17.1 | length 468.4
  Bottom Layer w10: R11.1 21580.69,5595 21823.46,5352.23 R17.1
NetR11_2: R11.2 U1.19 | length 2760.8
  Top Layer w10: v1(19410,5295) 19370,5255 19333.43,5255 19310,5278.43 19310,5399.14 19415.86,5505 19872.56,5505 19902.56,5535 19898.32,5539.24 v1(19898.32,5545.94)
  Bottom Layer w10: v1(19410,5295) 19468,5237 19603.12,5237 19607.38,5241.26 U1.19 ; v1(19898.32,5545.94) 19906.39,5537.87 19963.51,5595 R11.2
NetR12_1: R12.1 R18.1 | length 417.9
  Bottom Layer w10: R12.1 21685.69,5685 21818.46,5552.23 R18.1
NetR12_2: R12.2 U1.20 | length 2568.5
  Top Layer w10: v1(19470,5295) 19526.79,5238.21 19810.1,5238.21 19822.6,5250.71 19927.92,5250.71 20004.21,5327 20087.46,5327 20135,5374.54 20135,5670 20140,5675 v1(20240,5675)
  Bottom Layer w10: v1(19470,5295) 19510,5255 19595.67,5255 19601.61,5260.94 U1.20 ; v1(20240,5675) 21390.47,5675 R12.2
NetR13_1: R13.1 R19.1 | length 389.5
  Bottom Layer w10: R13.1 21745.87,5805 21816.06,5734.8 R19.1
NetR13_2: R13.2 U1.21 | length 2550
  Top Layer w10: v1(19530,5295) 19658.54,5295 19697.33,5256.21 19802.65,5256.21 19815.14,5268.71 19920.46,5268.71 19975,5323.25 19975,5330 19990,5345 20080,5345 20110,5375 20110,5800 v1(20240,5800)
  Bottom Layer w10: v1(19530,5295) 19540.82,5295 19555.19,5280.63 U1.21 ; v1(20240,5800) 21395.47,5800 R13.2
NetR20_2: R20.2 U1.42 U2.16 | length 3861.5
  Top Layer w10: v1(20355,5245) 20355,5234.18 20333,5212.18 20333,4895.86 20338.86,4890 20350,4890 v1(20635,4605)
  Bottom Layer w10: 20073.13,5241.87 20075,5240 20270,5240 20275,5245 v1(20355,5245) ; v1(20635,4605) 20687.43,4552.57 21968.8,4552.57 22056.37,4465 22520,4465 22615,4560 22615,4871.02 22560.2,4925.82 22560.2,5229.62 22554.81,5235 U2.16
NetR21_1: R21.1 U1.41 U2.15 | length 4481.3
  Top Layer w10: v1(21675,5255) 22375,5255 v1(22410,5290)
  Bottom Layer w10: U1.41 20192.99,5260.94 20217.05,5285 20831.89,5285 20870.59,5246.3 21485.43,5246.3 21500.07,5260.94 21669.06,5260.94 v1(21675,5255) ; v1(22410,5290) 22412.77,5287.23 22533.79,5287.23 U2.15 22565.2,5285 22797.8,5052.4 22797.8,4715.07 22791.94,4709.21 22678.16,4709.21 22669.37,4700.43 22669.37,4589.57 22724.94,4534 22793.13,4534 22915,4655.87 22915,5279.14 22920.86,5285 22959.62,5285 R21.1
NetR22_2: R22.2 U2.3 | length 198.6
  Bottom Layer w10: R22.2 22115.85,5352.57 22133.43,5335 U2.3
NetR23_1: R23.1 U2.1 | length 311.8
  Bottom Layer w10: R23.1 21976.54,5082.77 22025,5131.23 22025,5229.14 22030.86,5235 U2.1
NetR24_1: R24.1 R29.1 RL1.4 | length 2593.7
  Bottom Layer w10: R29.1 16662.96,4597.61 16704.26,4556.3 16846.37,4556.3 16864.84,4574.77 16864.84,4576.3 16878.54,4590 R24.1 16879.53,4623.7 17032.83,4777 17785.64,4777 18015,5006.36 18015,5043.64 17973.64,5085 17935.46,5085 17932.46,5088 17341.18,5088 17285,5031.82 17246.82,5031.82 RL1.4
NetR25_1: R25.1 U1.22 | length 949.1
  Bottom Layer w10: R25.1 18918.17,5322.77 18925.4,5330 19043.4,5330 19048.41,5335 19546.57,5335 19581.25,5300.31 U1.22
NRST: BT1.2 C7.1 U1.7 | length 7596.2
  Top Layer w10: v1(19853.52,4951.38) 20031.38,4951.38 v1(20115,5035) ; v1(21225,5120) 21255,5150 21980,5150 22045,5085 23195,5085 23290,5180 23290,5689.14 23295.86,5695 23820,5695 23875,5640 23875,5017.75 24273.31,4619.45 24273.31,4241.64 24220,4188.33 v1(24220,4105) 24278.29,4163.29 BT1.2
  Bottom Layer w10: v1(19853.52,4951.38) 19863.82,4961.67 U1.7 ; v1(20115,5035) 20664.24,5035 20669.24,5040 21199.54,5040 21225,5065.46 v1(21225,5120) ; C7.1@24082.77,3956.2 C7.1 24082.77,3964.07 24220,4101.3 v1(24220,4105)
OSC1: C5.1 U1.5 Y1.2 | length 799.7
  Bottom Layer w10: U1.5 19904.41,5063.86 19904.41,4995.86 19910.27,4990 20005,4990 20017.32,4977.68 Y1.2 20271.03,4875 20447.23,4698.8 C5.1
OSC2: C6.2 U1.6 Y1.1 | length 715.6
  Top Layer w10: v1(19735,4805) v1(19880,4805)
  Bottom Layer w10: C6.2 19652.43,4698.8 19682.68,4729.06 Y1.1 19710.65,4875 19735,4850.65 v1(19735,4805) ; v1(19880,4805) 19883.5,4808.5 19883.5,4924.79 19893.52,4934.81 19893.52,4967.94 19883.5,4977.96 U1.6
SWCLK: JP1.3 U1.37 | length 1568.8
  Top Layer w10: JP1.3 19951.5,6706.5 20024.26,6706.5 20062.65,6668.11 20062.65,6617.35 20085,6595 20085,5435 20071.82,5421.82 20057.65,5421.82 20038.33,5402.5 v1(20027.5,5402.5)
  Bottom Layer w10: v1(20027.5,5402.5) 20035.16,5394.84 20035.16,5359.84 20040,5355 U1.37@20040,5345
SWDIO: JP1.2 U1.34 | length 2044.1
  Top Layer w10: v1(19790,6325) 19795,6330 19795,6650 JP1.2
  Bottom Layer w10: v1(19790,6325) 19962.5,6152.5 19962.5,5997.5 20015,5945 20074.09,5945 20080.09,5951 20188.98,5951 20210.98,5973 20259.02,5973 20293,5939.02 20293,5890.98 20259.02,5857 20210.98,5857 20188.98,5879 20109.91,5879 19962.5,5731.59 19962.5,5619.44 19921.94,5578.89 19914.89,5585.94 19881.75,5585.94 19858.32,5562.51 19858.32,5529.38 19862.56,5525.13 19862.56,5518.43 19880,5500.99 19880,5473.43 19903.43,5450 19933.86,5450 19942.56,5441.3 U1.34
pads on no net: JP3.3 L5.1 MD1.6 MD1.7 U1.1 U1.2 U1.3 U1.4 U1.25 U1.26 U1.32 U1.33 U1.38 U1.39 U1.40 U1.43 U1.45 U1.46 U2.4 U3.0 Y1.0
copper on no net:
  other v2: 22236.5,4645 22535.9,4644.8

## Keep-outs
Keep-Out Layer:
  the board outline again, w10

## Text inside footprints (layer, text, board x,y; h text height)
LS1: Bottom Overlay "+" at 16686.5,5030.5 h60 r270